# Altium PCB PCB_电磁杆.pcbdoc
Units mil, origin at the board's own origin, x right, y up, seen from the top; angles counter-clockwise.
Board outline 14305 x 2815 mil, 2 copper layers (Top Layer, Bottom Layer); 15 components, 13 nets, 49 pads, 27 vias.
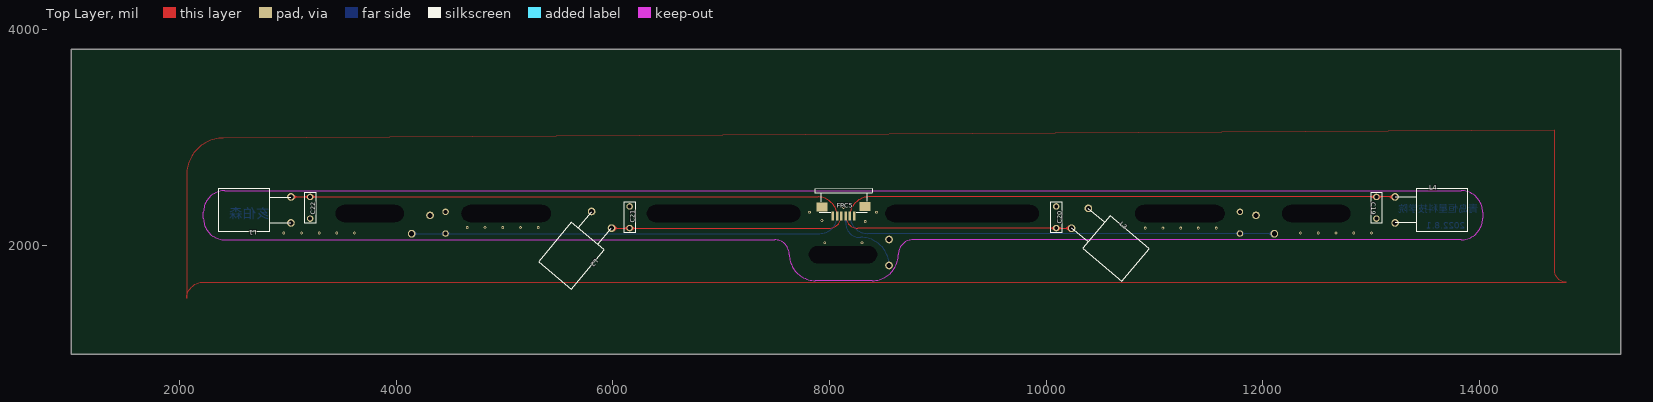
[diagram p0: Top Layer view]
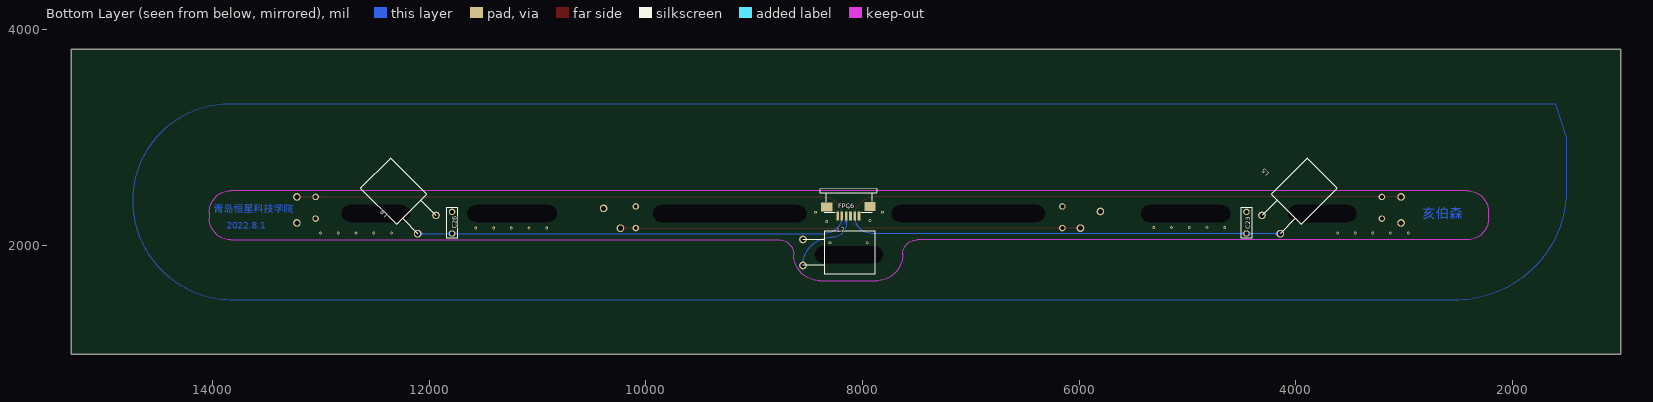
[diagram p1: Bottom Layer view, seen from below]

## Layer stack, top to bottom
Top Layer: signal copper (thickness not stored)
Dielectric: dielectric 12.6, FR-4, Dk 4.8
Bottom Layer: signal copper (thickness not stored)

## Board outline
15305,1000 1000,1000 1000,3815 15305,3815

## Components (designator, comment, footprint, x,y, rotation, side; value= is the part's Value field where it differs from the comment)
C19 "6.8nF" CAP-2.5*6.5*7.2#1 13050,2352.52 r270 top
C20 "6.8nF" CAP-2.5*6.5*7.2#1 10093.5,2265 r90 top
C21 "6.8nF" CAP-2.5*6.5*7.2#1 6155,2265 r90 top
C22 "6.8nF" CAP-2.5*6.5*7.2#1 3205,2352.52 r270 top
C23 "6.8nF" CAP-2.5*6.5*7.2#2 4455,2215 r270 bottom
C26 "6.8nF" CAP-2.5*6.5*7.2#2 11790,2215 r270 bottom
FPC5 "FPC1.0-6P" FPC-SMD_8P-P1.00_FPC1.0-8P-SJ#1 8090,2320 r0 top
FPC6 "FPC1.0-6P" FPC-SMD_8P-P1.00_FPC1.0-8P-SJ#2 8170,2320 r0 bottom
L1 "10mH工字电感" 10MH工字电感#1 2691.93,2332.84 r180 top
L2 "10mH工字电感" 10MH工字电感#1 5680,1985 r230 top
L3 "10mH工字电感" 10MH工字电感#1 10570,2040 r320 top
L4 "10mH工字电感" 10MH工字电感#1 13558.07,2332.84 r0 top
L5 "10mH工字电感" 10MH工字电感#2 3990,2435 r315 bottom
L7 "10mH工字电感" 10MH工字电感#2 8215,1940 r0 bottom
L8 "10mH工字电感" 10MH工字电感#2 12260,2435 r225 bottom

## Footprints (in the part's own frame and the unit in brackets; to place one, negate y for a bottom-side part, rotate by r counter-clockwise, add the part's x,y. Pads: shape width x height; smd on the part's side, far side on the other; paste and mask are expansions set on the pad)
10MH工字电感#1 [mm]
  round 1.8 hole 1.2 paste+0 mask+0.102: 1(-8.509,-3.048) 2(-8.509,3.048)
  silkscreen extent -8.5,-5 8.5,5
10MH工字电感#2 [mm]
  round 1.8 hole 1.2 paste+0 mask+0.102: 1(8.509,3.048) 2(8.509,-3.048)
  silkscreen extent -8.5,-5 8.5,5
CAP-2.5*6.5*7.2#1 [mil]
  round 60 hole 36 paste+0 mask+2: 1(-100,0) 2(100,0)
  silkscreen extent -142,-49 142,49
CAP-2.5*6.5*7.2#2 [mil]
  round 60 hole 36 paste+0 mask+2: 1(100,0) 2(-100,0)
  silkscreen extent -142,-49 142,49
FPC-SMD_8P-P1.00_FPC1.0-8P-SJ#1 [mm]
  rect 0.6x2.2 smd paste+0 mask+0.051: 1(3.497,-1.106) 2(2.497,-1.106) 3(1.495,-1.105) 4(0.496,-1.106) 5(-0.504,-1.106) 6(-1.504,-1.106)
  rect 2.6x2.1 smd paste+0 mask+0.051: 9(6.045,1.106) 10(-4.064,1.016)
  silkscreen extent -5.71,-0.38 7.71,5.24
FPC-SMD_8P-P1.00_FPC1.0-8P-SJ#2 [mm]
  rect 0.6x2.2 smd paste+0 mask+0.051: 1(-3.497,1.106) 2(-2.497,1.106) 3(-1.495,1.105) 4(-0.496,1.106) 5(0.504,1.106) 6(1.504,1.106)
  rect 2.6x2.1 smd paste+0 mask+0.051: 9(-6.045,-1.106) 10(4.064,-1.016)
  silkscreen extent -7.71,-5.24 5.71,0.38

## Free pads (board coordinates)
  oval 590.55x118.11 hole 157.48 slot 629.92 at 0 deg unplated paste+0 mask+4: 1(3754.92,2300) 1(8125,1920) 1(12495.08,2300)
  oval 787.4x118.11 hole 157.48 slot 826.77 at 0 deg unplated paste+0 mask+4: 1(5015,2300) 1(11235.47,2300)
  oval 1377.95x118.11 hole 157.48 slot 1417.32 at 0 deg unplated paste+0 mask+4: 1(7022.64,2300) 1(9225,2300)

## Via types
v1: diameter 25, hole 13, Top Layer to Bottom Layer, tented both sides, 27 vias

## Nets (pads, with @x,y where several pads share a name; then routed paths per layer and width w, separated by ;. In a path a pad name is that pad's centre, name@x,y a point inside that pad or via, vN(x,y) a via of type N, cw(c..) or ccw(c..) an arc to the next point about the centre after c; other vN are vias at no path point)
FPC5_2: C19.1 FPC5.2 L4.2 | length 5135.4
  Top Layer w10: FPC5.2 cw(c8364.35,2276.47) 8364.35,2452.52 C19.1 cw(c13050.31,2452.52) 13050.31,2452.82 L4.2
FPC5_3: C20.1 FPC5.3 L3.1 | length 2152
  Top Layer w10: FPC5.3 ccw(c8260.36,2276.49) 8260.36,2164.99 C20.1 ccw(c10095.09,2164.99) 10095.09,2163.4 L3.1
FPC5_4: C21.1 FPC5.4 L2.2 | length 2186.2
  Top Layer w10: L2.2 cw(c5987.77,2164.48) 5987.77,2164.99 C21.1 7998.06,2164.99 ccw(c7998.06,2276.47) FPC5.4
FPC5_5: C22.1 FPC5.5 L1.1 | length 5143.9
  Top Layer w10: L1.1 3204.69,2452.82 cw(c3204.69,2452.51) C22.1 7894.11,2452.51 cw(c7894.11,2276.47) FPC5.5
FPC6_2: C23.1 FPC6.2 L5.1 | length 4022.8
  Bottom Layer w10: L5.1 4453.27,2113.27 ccw(c4453.27,2115) C23.1 7910.23,2115 ccw(c7910.23,2276.47) FPC6.2
FPC6_4: FPC6.4 L7.1 | length 691.8
  Bottom Layer w10: FPC6.4@8150,2276 cw(c8150.47,2276) FPC6.4 ; 8150.47,2204.53 ccw(c8275,2204.53) 8275,2080 8290,2080 cw(c8290,1820) L7.1 ; 8150.5,2204.5 FPC6.4
FPC6_5: C26.1 FPC6.5 L8.2 | length 4011.3
  Bottom Layer w10: FPC6.5 ccw(c8351.31,2276.47) 8351.31,2115 C26.1 ccw(c11791.73,2115) 11791.73,2113.27 L8.2
GND: C19.2 C20.2 C21.2 C22.2 C23.2 C26.2 FPC5.1 FPC5.6 FPC6.1 FPC6.6 L1.2 L2.1 L3.2 L4.1 L5.2 L7.2 L8.1
  other v1: 7955,2030 8300,2030 2960,2120 3123.75,2120 3287.5,2120 3451.25,2120 3615,2120 12350,2120 12513.75,2120 12677.5,2120 12841.25,2120 13005,2120 10915,2165 11078.75,2165 11242.5,2165 11406.25,2165 11570,2165 4655,2170 4818.75,2170 4982.5,2170 5146.25,2170 5310,2170 8330,2225 7930,2235 7815,2310 8435,2310 8130,2355
S$2811: 
S$2821: 
S$2901: 
S$2914: 
S$2918: 
pads on no net: FPC5.9 FPC5.10 FPC6.3 FPC6.9 FPC6.10

## Polygon pours and split planes (outlines as drawn)
GND on Top Layer (solid): 2400,2995 ccw(c2400,2660) 2065,2660 2065,1515 cw(c2215,1515) 2215,1665 14805,1665 cw(c14805,1775) 14695,1775 14695,3070
GND on Bottom Layer (solid): 1500,3000 1500,2525 ccw(c2525,2525) 2525,1500 13815,1500 ccw(c13815,2420) 14735,2420 ccw(c13840,2420) 13840,3315 1605,3315

## Keep-outs
Keep-Out Layer:
  lines w10: 2219.49,2313.15 cw(c2416.34,2313.15) 2416.34,2510 ; 13833.66,2510 cw(c13833.66,2313.15) 14030.51,2313.15
  lines w10 net S$2811: 2219.49,2254.09 ccw(c2416.34,2254.09) 2416.34,2057.24
  lines w10 net S$2821: 8635,1920 cw(c8772.24,1920) 8772.24,2057.24 ; 13833.66,2057.24 ccw(c13833.66,2254.09) 14030.51,2254.09
  lines w10 net S$2901: 7492.76,2057.24 cw(c7492.76,1920) 7630,1920
  lines w10 net S$2914: 8395,1680 ccw(c8395,1920) 8635,1920
  lines w10 net S$2918: 7630,1920 ccw(c7870,1920) 7870,1680

## Other copper
Top Layer:
  region net FPC5_2: 13030.16,2430.02 13030.16,2475.02 13009.16,2457.52 13009.16,2447.52
  region net FPC5_2: 13070.01,2430.17 13069.67,2475.17 13090.8,2457.82 13090.88,2447.82
  region net FPC5_3: 10114.21,2186.7 10112.45,2141.73 10134.12,2158.4 10134.51,2168.4
  region net FPC5_3: 10073.66,2187.49 10073.66,2142.49 10052.66,2159.99 10052.66,2169.99
  region net FPC5_4: 6135.16,2142.49 6135.16,2187.49 6114.16,2169.99 6114.16,2159.99
  region net FPC5_4: 6174.85,2142.49 6174.84,2187.49 6195.84,2170 6195.84,2160
  region net FPC5_5: 3185.33,2475.16 3184.98,2430.16 3164.12,2447.82 3164.2,2457.82
  region net FPC5_5: 3224.85,2430.01 3224.84,2475.01 3245.84,2457.51 3245.84,2447.51
  region net FPC5_5: 3050.37,2426.25 3050.37,2479.4 3075.17,2457.82 3075.17,2447.82
  region net FPC5_4: 6010.99,2138.15 6010.42,2191.3 6035.45,2169.99 6035.56,2159.99
  region net FPC5_3: 10212.81,2136.82 10212.81,2189.97 10188.01,2168.4 10188.01,2158.4
  region net FPC5_2: 13199.64,2479.4 13199.63,2426.25 13174.83,2447.82 13174.83,2457.82
Bottom Layer:
  region net FPC6_2: 4436.13,2091.68 4434.22,2136.64 4413.98,2118.27 4414.41,2108.27
  region net FPC6_2: 4474.84,2092.5 4474.84,2137.5 4495.84,2120 4495.84,2110
  region net FPC6_5: 11810.78,2136.64 11808.87,2091.68 11830.59,2108.27 11831.02,2118.27
  region net FPC6_5: 11770.16,2092.5 11770.16,2137.5 11749.16,2120 11749.16,2110
  region net FPC6_2: 4165.47,2086.69 4165.47,2139.84 4190.27,2118.27 4190.27,2108.27
  region net FPC6_5: 12084.53,2086.69 12084.53,2139.84 12059.73,2118.27 12059.73,2108.27
  region net FPC6_4: 8138.66,2233.16 8162.28,2233.16 8155.47,2218.16 8145.47,2218.16
  text "青岛恒星科技学院" at 13990,2290 h118.11
  text "亥伯森" at 2830,2225 h157.48
  text "2022.8.1" at 13870,2135 h102.36

## Silkscreen, mask and mechanical layers (free items; w line width, h text height)
Bottom Solder:
  text "青岛恒星科技学院" at 13990,2290 h118.11
  text "亥伯森" at 2829.72,2224.64 h157.48
  text "2022.8.1" at 13868.5,2135.98 h102.36
Document:
  lines w0.1: 8152.49,2407.49 8152.51,2407.51